# Altium PCB ESP32-PicoDK-min.PcbDoc
Units mil, origin at the board's own origin, x right, y up, seen from the top; angles counter-clockwise.
Board outline 2080 x 860 mil, 2 copper layers (Top1, Bottom2), stack 40.202 mil thick; 29 components, 48 nets, 156 pads, 115 vias.
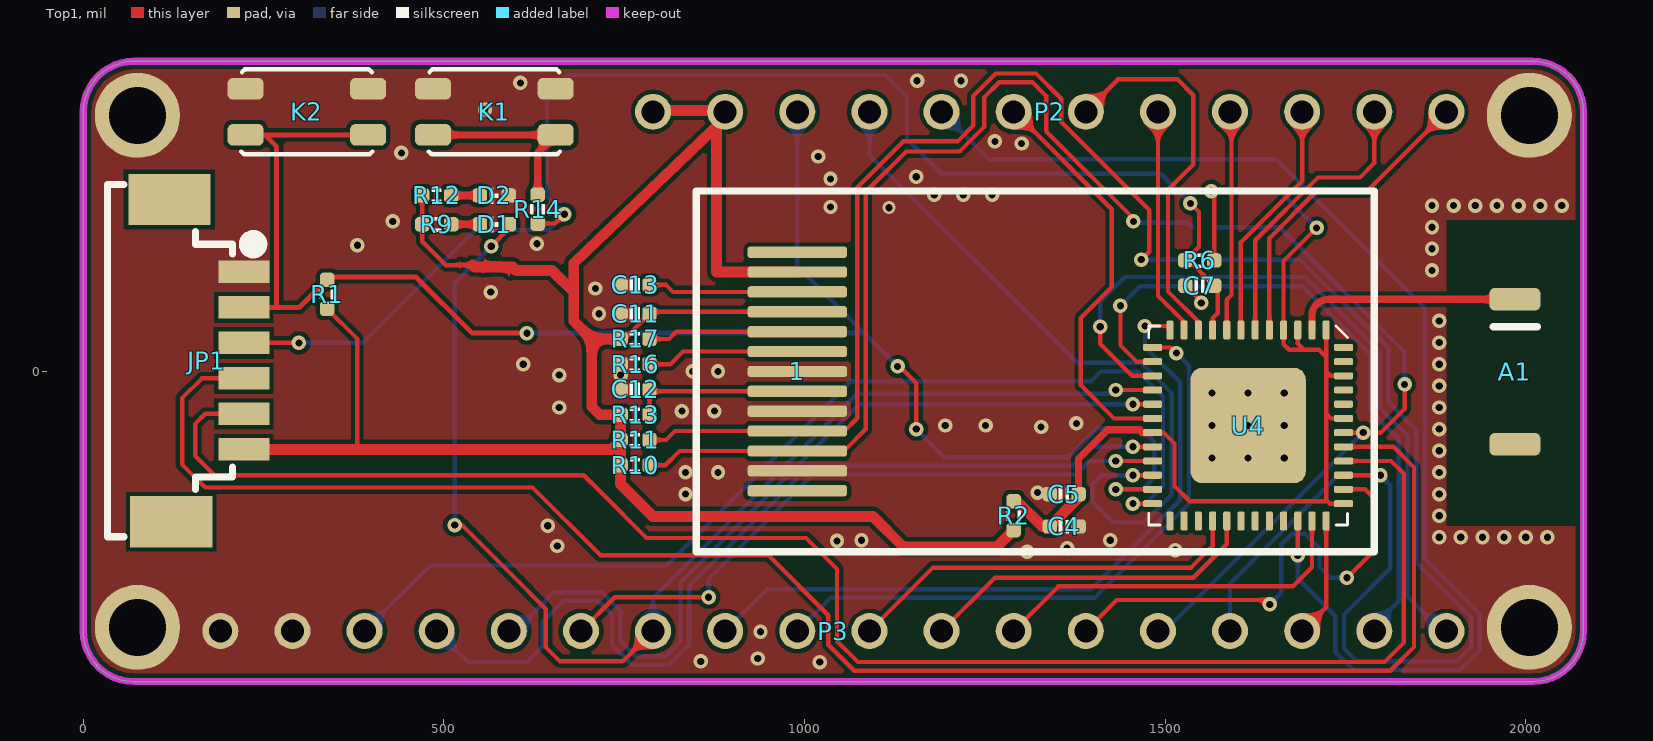
[diagram p0: Top1 view]
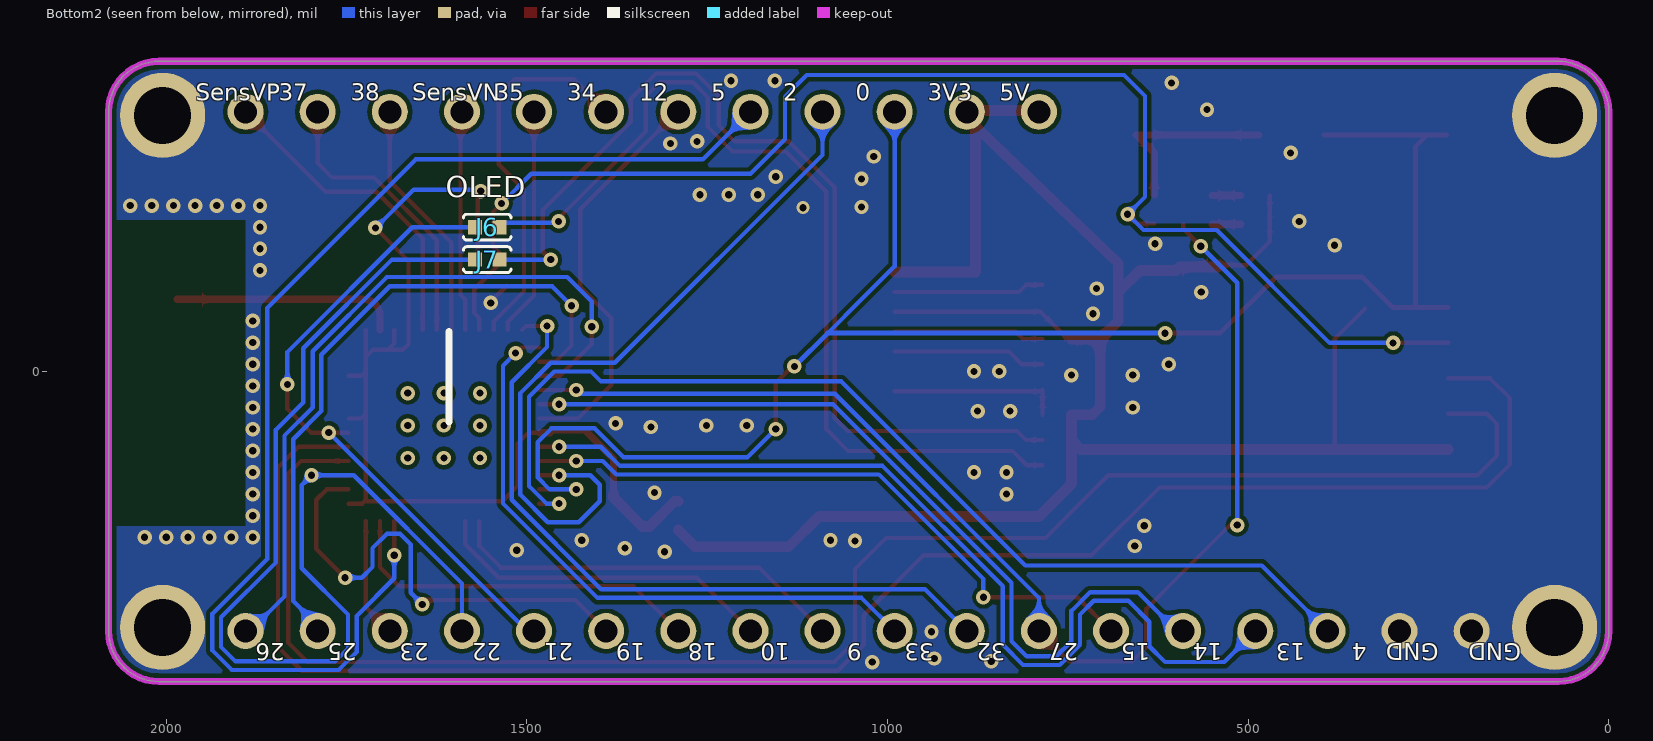
[diagram p1: Bottom2 view, seen from below]
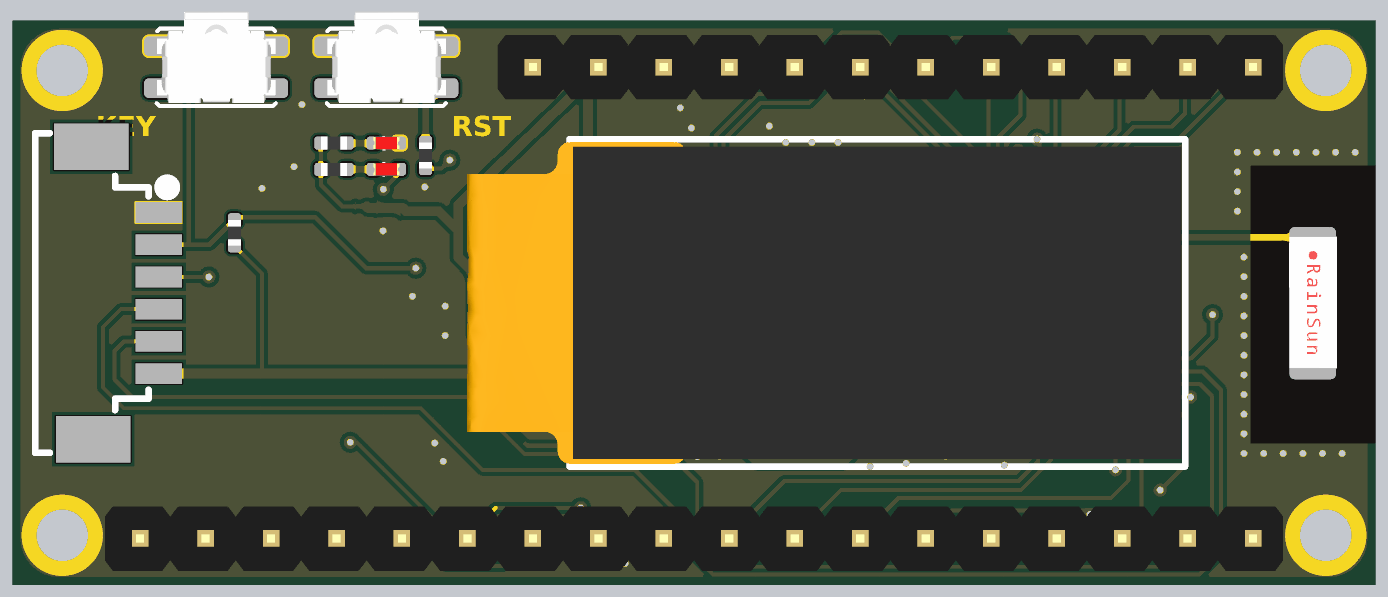
[diagram p2: 3D render of the assembled board from above, using the file's embedded part models]

## Layer stack, top to bottom
Top Solder: solder mask 0.4, Solder Resist, Dk 3.5
Top1: signal copper 1.4
Dielectric 1: core 37.4016, FR-4, Dk 4.2
Bottom2: signal copper 1.4
Bottom Solder: solder mask 0.4, Solder Resist, Dk 3.5

## Board outline
0,-360 0,360 cw(c70,360) 70,430 2010,430 cw(c2010,360) 2080,360 2080,-360 cw(c2010,-360) 2010,-430 70,-430 cw(c70,-360)

## Design rules (kind name [scope] priority, off if disabled: settings)
Clearance [All] p1: gap=6 ignorepadtopadclearanceinfootprint=FALSE
ComponentClearance [All] p1: gap=0 collisioncheckmode=3 verticalgap=0 showdistances=FALSE
DiffPairsRouting [All] p1: maxlimit=9 minlimit=9 mostfreqgap=9 toplayer_minwidth=4 toplayer_maxwidth=4 toplayer_prefwidth=4 bottomlayer_minwidth=4 bottomlayer_maxwidth=4 bottomlayer_prefwidth=4 maxuncoupledlength=500
FanoutControl Fanout_BGA [All] p1: bgadir=Out bgaviamode=Centered fanoutstyle=Auto fanoutdirection=Alternating viagrid=1 // Fanout_BGA (Default Rule)
HoleSize [All] p1: absolutevalues=TRUE maxlimit=10000 minlimit=8 maxpercent=80.000 minpercent=20.000
MinimumSolderMaskSliver [All] p1 off: minsoldermaskwidth=2
PlaneClearance [All] p1: clearance=8
PlaneConnect [All] p1: planeconnectstyle=Direct reliefexpansion=20 reliefentries=4 reliefconductorwidth=10 reliefairgap=10
PolygonConnect [All] p1: connectstyle=Direct reliefconductorwidth=10 reliefentries=4 polygonreliefangle="90 Angle" airgapwidth=10
RoutingVias [All] p1: holewidth=8 width=16 viastyle="Through Hole" minholewidth=6 minwidth=12 maxholewidth=28 maxwidth=50
SilkToBoardRegionClearance [All] p1 off:
SilkToSilkClearance [All] p1: silktosilkclearance=0
SilkToSolderMaskClearance [IsPad] p1: minsilkscreentomaskgap=0 clearancetoexposedcopper=TRUE
SolderMaskExpansion [All] p1: expansion=3
Width [All] p1: maxlimit=10000 minlimit=6 preferedwidth=7
20 further rules are at their usual default settings.

## Components (designator, comment, footprint, x,y, rotation, side; value= is the part's Value field where it differs from the comment)
1 "OLED-12880" OLED-12880 990,0 r180 top locked
A1 "RAINSUN" ANT-Rainsun-AN5120 1985,0 r270 top
C4 "10uF" CAP_0402 1360,-215 r180 top value=0.1u
C5 "0.1uF" CAP_0402 1360,-170 r0 top value=0.1u
C7 "0.1uF" CAP_0402 1548,118.89 r180 top value=0.1u
C11 "10uF" CAP_0402 765,80 r0 top value=0.1u
C12 "10uF" CAP_0402 765,-25 r0 top value=0.1u
C13 "10uF" CAP_0402 765,120 r0 top value=0.1u
D1 "color?" LED_0402_RED 570,204 r0 top
D2 "color?" LED_0402_RED 570,244 r0 top
J6 "跳线" 0402-0R 1555,200 r0 bottom
J7 "跳线" 0402-0R 1555,155 r0 bottom
JP1 "SPI1" CONN-SMD_6P-P1.25_DEALON_1.25-6PWB 171,15 r270 top
K1 "TACT 4P" ButtonTACT_3.5*3.55_90 570,360 r0 top value=3.4x3.5
K2 "TACT 4P" ButtonTACT_3.5*3.55_90 310,360 r0 top value=3.4x3.5
P2 "HDR1x12_2.54" HDR1X12_2.54_180 1890,360 r270 top locked
P3 "HDR1x18_2.54" HDR1X18_2.54_180 1890,-360 r270 top locked
R1 "10K" RES_0402 338,107 r270 top value=22R
R2 "0R" RES_0402 1290,-200 r90 top value=22R
R6 "10K" RES_0402 1548,153.89 r180 top value=22R
R9 "1K" RES_0402 490,204 r0 top value=22R
R10 "10K" RES_0402 765,-130 r180 top value=22R
R11 "10K" RES_0402 765,-95 r180 top value=22R
R12 "1K" RES_0402 490,244 r0 top value=22R
R13 "10K" RES_0402 765,-60 r180 top value=22R
R14 "1K" RES_0402 630,225 r270 top value=22R
R16 "560K" RES_0402 765,10 r180 top value=22R
R17 "4.7K" RES_0402 765,45 r180 top value=22R
U4 "ESP32_SIP" QFN-48_7X7 1615,-75 r270 top

## Footprints (in the part's own frame and the unit in brackets; to place one, negate y for a bottom-side part, rotate by r counter-clockwise, add the part's x,y. Pads: shape width x height; smd on the part's side, far side on the other; paste and mask are expansions set on the pad)
0402-0R [mm] "选择焊盘"
  rect 0.5x0.5 smd: 1(-0.432,0) 2(0.432,0)
  silkscreen extent -0.84,-0.46 0.84,0.46
ANT-Rainsun-AN5120 [mm] "选择焊盘"
  rrect50% 0.8x1.8 smd: 1(-2.54,0) ""(2.563,0)
  silkscreen extent -1.57,-0.76 -1.57,0.79, body extent -2.57,-0.91 2.54,0.94, height 1.32
ButtonTACT_3.5*3.55_90 [mil]
  rrect50% 50x30 smd: 1(-85,32) 2(-85,-32) 3(85,32) 4(85,-32)
  silkscreen extent -91,-59 91,59, body extent -90,-55 91,85, height 56
CAP_0402 [mil]
  rrect50% 20x20 smd: 1(-20,0) 2(20,0)
  silkscreen extent -7,-9 7,9, body extent -20,-10 20,10, height 20
CONN-SMD_6P-P1.25_DEALON_1.25-6PWB [mm]
  rect 0.8x1.8 smd mask+0.05: 1(-3.125,1.31) 2(-1.875,1.31) 3(-0.625,1.31) 4(0.625,1.31) 5(1.875,1.31) 6(3.125,1.31)
  rect 1.8x2.9 smd mask+0.05: 7(-5.675,-1.31) 8(5.675,-1.24)
  silkscreen extent -6.2,-3.49 6.2,1.88
HDR1X12_2.54_180 [mil]
  round 50 hole 32: 1(0,0) 2(0,-100) 3(0,-200) 4(0,-300) 5(0,-400) 6(0,-500) 7(0,-600) 8(0,-700) 9(0,-800) 10(0,-900) 11(0,-1000) 12(0,-1100)
  body extent -49,-1150 49,50, height 323
HDR1X18_2.54_180 [mil]
  round 50 hole 32: 1(0,0) 2(0,-100) 3(0,-200) 4(0,-300) 5(0,-400) 6(0,-500) 7(0,-600) 8(0,-700) 9(0,-800) 10(0,-900) 11(0,-1000) 12(0,-1100) 13(0,-1200) 14(0,-1300) 15(0,-1400) 16(0,-1500) 17(0,-1600) 18(0,-1700)
  body extent -49,-1750 49,50, height 323
LED_0402_RED [mil]
  rrect50% 20x20 smd: 1(-20,0) 2(20,0)
  silkscreen extent -6,-11 6,10, body extent -20,-10 20,10, height 18
OLED-12880 [mm]
  rrect50% 3.5x0.4 smd: 1(0,-4.2) 2(0,-3.5) 3(0,-2.8) 4(0,-2.1) 5(0,-1.4) 6(0,-0.7) 7(0,0) 8(0,0.7) 9(0,1.4) 10(0,2.1) 11(0,2.8) 12(0,3.5) 13(0,4.2)
  silkscreen extent -20.32,-6.35 3.56,6.35, body extent -20.18,-6.25 7.54,6.25, height 1.55
QFN-48_7X7 [mm]
  rrect50% 0.675x0.25 smd: 1(-3.362,2.75) 2(-3.362,2.25) 3(-3.362,1.75) 4(-3.362,1.25) 5(-3.362,0.75) 6(-3.362,0.25) 7(-3.362,-0.25) 8(-3.362,-0.75) 9(-3.362,-1.25) 10(-3.362,-1.75) 11(-3.362,-2.25) 12(-3.362,-2.75) 25(3.363,-2.75) 26(3.363,-2.25) 27(3.363,-1.75) 28(3.363,-1.25) 29(3.363,-0.75) 30(3.363,-0.25) 31(3.363,0.25) 32(3.363,0.75) 33(3.363,1.25) 34(3.363,1.75) 35(3.363,2.25) 36(3.363,2.75)
  rrect50% 0.25x0.675 smd: 13(-2.75,-3.362) 14(-2.25,-3.362) 15(-1.75,-3.362) 16(-1.25,-3.362) 17(-0.75,-3.362) 18(-0.25,-3.362) 19(0.25,-3.362) 20(0.75,-3.362) 21(1.25,-3.362) 22(1.75,-3.362) 23(2.25,-3.362) 24(2.75,-3.362) 37(2.75,3.363) 38(2.25,3.363) 39(1.75,3.363) 40(1.25,3.363) 41(0.75,3.363) 42(0.25,3.363) 43(-0.25,3.363) 44(-0.75,3.363) 45(-1.25,3.363) 46(-1.75,3.363) 47(-2.25,3.363) 48(-2.75,3.363)
  rrect20% 4.064x4.064 smd: 49(0,0)
  silkscreen extent -3.5,-3.5 3.5,3.5, body extent -3.5,-3.5 3.5,3.5, height 1
RES_0402 [mil]
  rrect50% 20x20 smd: 1(-20,0) 2(20,0)
  silkscreen extent -7,-10 7,10, body extent -20,-10 20,10, height 14

## Part data
A1: library part ANT-Rainsun-AP5120
C4 C5 C7 C11 C12 C13: library part 电容-0402, "Capacitor"
D1 D2: library part LED_0402, "LED", Type=0402
J6 J7: "Resistor", LatestRevisionDate=17-Jul-2002, LatestRevisionNote="Re-released for DXP Platform.", PackageDescription="Axial Device, Thru-Hole; 2 Leads; 0.4 in Pin Spacing", PackageReference=AXIAL-0.4, Published=8-Jun-2000, Publisher="Altium Limited"
JP1: library part "HEADER 6"
K1 K2: library part ButtonTACT, "Button", Type="TACT 4P"
P2 P3: "Header"
R1 R2 R6 R9 R10 R11 R12 R13 R14 R16 R17: library part 电阻-0402, "Resistor"
U4: library part ESP32-PICO

## Free pads (board coordinates)
  round 118.11 hole 78.74: ""(75,-355) ""(75,355) ""(2005,-355) ""(2005,355)

## Via types
v1: diameter 20, hole 10, Top1 to Bottom2, tented both sides, 114 vias
v2: diameter 18, hole 10, Top1 to Bottom2, tented both sides, 1 vias

## Nets (pads, with @x,y where several pads share a name; then routed paths per layer and width w, separated by ;. In a path a pad name is that pad's centre, name@x,y a point inside that pad or via, vN(x,y) a via of type N, cw(c..) or ccw(c..) an arc to the next point about the centre after c; other vN are vias at no path point)
3V3A: C4.2 C5.2 R2.2 R6.1 U4.1 U4.3 U4.4 U4.19 U4.37 U4.43 U4.46 | length 1470.8
  Top1 w6: U4.19 1497.84,-84.84 1513,-100 1513,-159 1534,-180 1721.53,-180 1723.27,-178.27 ; v1(1563.99,250) 1568,245.99 R6.1 ; U4.3 1683.9,38.74 1692.63,30 ; v1(1710,199) 1664.21,153.21 U4.4 1664.21,37.79 1672,30 1692.63,30 ; U4.1 1723.27,20 ; U4.37 1728.27,-183.27 1723.27,-178.27 ; U4.43 1730.16,-65.16 1723.27,-58.27 ; U4.46 1729.1,-6.1 1723.27,-0.27 ; 1692.63,30 1713.27,30 1723.27,20 ; 1723.27,-178.27 1723.27,-58.27 ; 1723.27,-58.27 1723.27,-0.27 ; 1723.27,-0.27 1723.27,20
  Top1 w7: C4.2@1335,-215 C4.2
  Top1 w10: C5.2 1380,-121 1420,-81 1464,-81 1468,-85 1482.46,-85 U4.19
  Top1 w15: R2.2 1295,-180 1330,-215 C4.2@1335,-215 ; C4.2 1380,-175 C5.2
  Bottom2 w6: v1(1563.99,250) 1565.99,252 1657,252 v1(1710,199)
EN: C7.1 JP1.3 R6.2 R14.2 U4.9 | length 1960
  Top1 w6: JP1.3 v1(299,39.61) ; R14.2 654,205 v1(667,218) ; v1(1535,233) 1547,221 1547,172.89 R6.2 1533,153.89 C7.1 1573,113.89 1573,81 1565.79,73.79 U4.9
  Bottom2 w6: v1(299,39.61) 386.92,39.61 543.31,196 645,196 v1(667,218) 643,242 643,382 672,411 1112,411 1142,381 1142,322 1190,274 1337,274 1494,274 v1(1535,233)
FLASH_CLK: U4.31
FLASH_CS: U4.25
FLASH_SD0: U4.27
FLASH_SD1: U4.33
FLASH_SD2: U4.30
FLASH_SD3: U4.32
GND: 1.7 1.9 1.12 C4.1 C5.1 C7.2 C11.1 C12.1 C13.1 D2.2 JP1.1 K1.1 K1.3 K2.1 K2.3 P3.17 P3.18 pad. R16.2 | length 33
  Top1 w6: C7.2 1550,96.89 v1(1550,95)
  other v1: 1021,-403 856,-402 935,-398 939,-361 1309,-250 1514,-248 1364,-245 657,-242 1045,-235 1079,-234 1424,-234 1880,-230 1910,-230 1940,-230 1970,-230 2000,-230 2030,-230 644,-214 1880,-200 835,-170 1880,-170 1323,-168 835,-140 880,-140 1880,-140 1880,-110 1880,-80 1328,-77 1195,-75 1251,-75 1377,-72 830,-55 875,-55 660,-50 1880,-50 1880,-20 660,-5 745,-5 845,0 880,0 610,10 1880,10 1880,40 1880,70 715,80 565,110 710,115 1870,140 1870,170 380,175 629,177 1870,200 429,208 1036,228 1870,230 1900,230 1930,230 1960,230 1990,230 2020,230 2050,230 1180,245 1220,245 1260,245 1036,267 1155,270 1019,298 441,303 1301,316 1264,319 557,363 606,400 1156,403 1217,403
  other v2: 1117,227
GPIO0: JP1.2 K2.2 K2.4 P2.10 R1.1 U4.23 | length 2433.1
  Top1 w6: v1(1129,7) 1132,7 1155,-16 1155,-35.71 v1(1155,-80) ; v1(1431.42,-163.58) U4.23
  Top1 w7: JP1.2 267.13,88.82 ; K2.2 251.63,328 ; K2.4 251.63,328 ; v1(615,53) 539.21,53 461.14,131.08 342.08,131.08 R1.1 299.82,88.82 267.13,88.82 ; 251.63,328 268.13,311.5 268.13,89.82 267.13,88.82
  Bottom2 w6: P2.10 990,146 v1(1129,7) ; v1(1155,-80) 1194,-119 1366,-119 1406,-79 1466,-79 1485,-98 1485,-147 1468.42,-163.58 v1(1431.42,-163.58)
  Bottom2 w7: v1(615,53) 1083,53 v1(1129,7)
GPIO2: P2.9 U4.22 | length 1006.5
  Top1 w6: v1(1455.27,-143.9) U4.22
  Bottom2 w6: P2.9 1090,300 1378,12 1457,12 1466.97,12 1509,-30.03 1509,-171 1471,-209 1428,-209 1399,-180 1399,-157 1412.1,-143.9 v1(1455.27,-143.9)
GPIO4: P3.16 U4.24 | length 1473.7
  Top1 w6: v1(1455.27,-183.27) U4.24
  Bottom2 w6: P3.16 481,-269 809,-269 1064.21,-13.79 1397.21,-13.79 1411,0 1462,0 1497,-35 1497,-159 1472.73,-183.27 v1(1455.27,-183.27)
GPIO5: P2.8 U4.34 | length 1713.9
  Top1 w6: v1(1683.9,-254.9) U4.34
  Bottom2 w6: P2.8 1256,294 1654,294 1860,88 1860,-260 1936,-336 1936,-386.97 1908.97,-414 1761.03,-414 1736,-388.97 1736,-339 1683.9,-286.9 v1(1683.9,-254.9)
GPIO9: P3.9 U4.28 | length 559.4
  Top1 w6: P3.9 1178,-272 1536.03,-272 1565.79,-242.24 U4.28
GPIO10: P3.8 U4.29 | length 477.5
  Top1 w6: P3.8 1264,-286 1539,-286 1585.47,-239.53 U4.29
GPIO12: P2.7 U4.18 | length 572.5
  Top1 w6: P2.7 1291,360 1426,225 1426,117 1383,74 1383,-19 1429.16,-65.16 U4.18
GPIO13: P3.15 U4.20 | length 1299.8
  Top1 w6: v1(1455.27,-104.53) U4.20
  Bottom2 w6: P3.15 533,-403 615,-403 637,-381 637,-347 666,-318 714,-318 733,-337 733,-378.97 761.03,-407 812.03,-407 840,-379.03 840,-297.91 1006.91,-131 1370.97,-131 1397.44,-104.53 v1(1455.27,-104.53)
GPIO14: P3.14 U4.17 | length 1168.7
  Top1 w6: v1(1455.27,-45.47) U4.17
  Bottom2 w6: P3.14 599,-360 653,-306 718.97,-306 745,-332.03 745,-342 745,-374 766,-395 807.06,-395 828,-374.06 828,-292.94 1075.47,-45.47 v1(1455.27,-45.47)
GPIO15: P3.13 U4.21 | length 905
  Top1 w6: P3.13 737,-313 v1(867,-313) ; v1(1431.42,-124.21) U4.21
  Bottom2 w6: v1(867,-313) 867,-287.88 1011.88,-143 1375.94,-143 1394.73,-124.21 v1(1431.42,-124.21)
GPIO18: P3.7 U4.35 | length 514.3
  Top1 w6: P3.7 1352,-298 1677,-298 1703.58,-271.42 U4.35
GPIO19: P3.6 U4.38 | length 677.8
  Top1 w6: P3.6 1433,-317 1639,-317 v1(1645,-323) ; U4.38 1777.58,-163.58 1792,-178 1792,-246 v1(1752,-286)
  Bottom2 w6: v1(1645,-323) 1661,-307 1661,-239.97 1675.97,-225 1694,-225 1714,-245 1714,-271 1729,-286 v1(1752,-286)
GPIO21: J6.2 P3.5 U4.42 | length 907.6
  Top1 w6: U4.42 v1(1774.73,-84.84) 1799.16,-84.84 1832,-52 v1(1832,-18)
  Bottom2 w6: P3.5 1499.58,-360 v1(1774.73,-84.84) ; J6.2 1659,200 1832,27 v1(1832,-18)
GPIO22: J7.2 P3.4 U4.39 | length 1602.1
  Top1 w6: U4.39 v1(1798.58,-143.9)
  Bottom2 w6: J7.2 1687.03,155 1810,32.03 1810,-43 1848,-81 1848,-264.97 1924,-340.97 1924,-382 1904,-402 1766,-402 1748,-384 1748,-337 1812,-273 1812,-157.35 v1@1798.58,-143.93 ; P3.4 1590,-294 1740.1,-143.9 v1(1798.58,-143.9)
GPIO23: P3.3 U4.36 | length 166.4
  Top1 w6: P3.3 1723.27,-326.73 U4.36
GPIO25: P3.2 U4.14 | length 919.8
  Top1 w6: v1(1438,91) 1438,35.91 1460.33,13.58 U4.14
  Bottom2 w6: v1(1438,91) 1465,118 1690.09,118 1785,23.09 1785,-54.97 1824,-93.97 1824,-318.33 1790,-352.33 P3.2
GPIO26: P3.1 U4.15 | length 1023.7
  Top1 w6: v1(1410.03,62.03) 1410,38 1454.1,-6.1 U4.15
  Bottom2 w6: v1(1410.03,62.03) 1410,97 1444,131 1694.06,131 1797,28.06 1797,-50 1836,-89 1836,-312 1884,-360 P3.1
GPIO27: D1.2 P3.12 U4.16 | length 1707.8
  Top1 w6: v1(515,-213) 525,-213 595,-283 641,-329 641,-382 661,-402 748,-402 P3.12 ; v1(565.5,173.5) 590,198 D1.2 ; v1(1431.42,-25.79) U4.16
  Bottom2 w6: v1(515,-213) 515,123 v1(565.5,173.5) ; P3.12 790,-313.97 1072.97,-31 1426.2,-31 v1(1431.42,-25.79)
GPIO32: P3.11 U4.12 | length 1004.8
  Top1 w6: v1(1472,63) 1501.11,63 U4.12
  Bottom2 w6: P3.11 948,-302 1397.03,-302 1521,-178.03 1521,-15.03 1472,33.97 v1(1472,63)
GPIO33: P3.10 U4.13 | length 868.2
  Top1 w6: U4.13 1507.73,33.27 v1(1515.58,25.42)
  Bottom2 w6: P3.10 1036,-314 1402,-314 1533,-183 1533,8 v1(1515.58,25.42)
GPIO34: P2.6 U4.10 | length 534.3
  Top1 w6: P2.6 1435,405 1517,405 1539,383 1539,287 1504,252 1504,111 1546.1,68.9 U4.10
GPIO35: P2.5 U4.11 | length 317.7
  Top1 w6: P2.5 1490,105 1526.42,68.58 U4.11
GPIO37: P2.2 U4.6 | length 405
  Top1 w6: U4.6 1624.84,181.87 1711.97,269 1770,269 1790,289 P2.2
GPIO38: P2.3 U4.7 | length 337.9
  Top1 w6: U4.7 1605,57.54 1605,179 1690,264 P2.3
Net1_3: 1.3 C13.2 | length 209
  Top1 w6: C13.2 808,120 817.76,110.24 1.3
Net1_5: 1.5 R17.1 | length 209.2
  Top1 w6: R17.1 812,45 822.12,55.12 1.5
Net1_6: 1.6 R16.1 | length 212.3
  Top1 w6: R16.1 814,10 831.56,27.56 1.6
Net1_8: 1.8 C12.2 R13.1 | length 241.1
  Top1 w6: R13.1 C12.2 787.56,-27.56 1.8
NetA1_1: A1.1 U4.2 | length 350.3
  Top1 w10: U4.2 1703.58,78.09 ; A1.1 1727.66,100 ; 1703.58,78.09 cw(c1723.96,78.09) 1709.55,92.5 ; 1703.58,78.09 cw(c1723.96,78.09) 1709.55,92.5 ; 1709.55,92.5 cw(c1727.66,74.39) 1727.66,100 ; 1709.55,92.5 cw(c1727.66,74.39) 1727.66,100
NetD1_1: D1.1 R9.2 | length 40
  Top1 w10: R9.2 D1.1
NetD2_1: D2.1 R12.2 | length 40
  Top1 w10: R12.2 D2.1
NetK1_2: K1.2 K1.4 R14.1 | length 263.4
  Top1 w10: K1.2 K1.4 630,303 R14.1
OLED_SCL: 1.10 J7.1 R11.1 | length 1356.5
  Top1 w6: R11.1 808,-95 820.33,-82.67 1.10 1055.33,-82.67 1073,-65 1073,255 1137,319 1212.03,319 1234,340.97 1234,382 1265,413 1320.97,413 1356,377.97 1356,345.92 1478,223.92 1478,166 v1(1467,155)
  Bottom2 w6: v1(1467,155) J7.1
OLED_SDA: 1.11 J6.1 R10.1 | length 1312.8
  Top1 w6: R10.1 807,-130 826.77,-110.23 1.11 1054.77,-110.23 1085,-80 1085,249 1141,305 1215,305 1249,339 1249,380 1270,401 1316,401 1335,382 1335,333 1458.87,209.13 1457.75,208 v1(1456,208)
  Bottom2 w6: v1(1456,208) 1456,203 1459,206 1532,206 J6.1
RXD: JP1.5 U4.40 | length 2306.7
  Top1 w6: JP1.5 169.19,-58.81 155,-73 155,-117 182,-144 694,-144 719,-169 781,-231 1002,-231 1045,-274 1045,-374.03 1073.97,-403 1804,-403 1831,-376 1831,-142 1813.21,-124.21 U4.40
SENSOR_VN: P2.4 U4.8 | length 306.2
  Top1 w6: U4.8 1585.47,99.44 1592,105.97 1592,358 P2.4
SENSOR_VP: P2.1 U4.5 | length 445.3
  Top1 w6: U4.5 1644.53,184.59 1708.94,249 1779,249 P2.1
TXD: JP1.4 U4.41 | length 2411.5
  Top1 w6: JP1.4 164.4,-9.6 137,-37 137,-129 169,-161 590.5,-161 623,-161 717,-255 950,-255 1033,-338 1033,-379 1069,-415 1812,-415 1845,-382 1845,-133 1816.53,-104.53 U4.41
VCC_3V3: 1.2 1.4 C11.2 JP1.6 P2.11 P2.12 R1.2 R2.1 R9.1 R10.2 R11.2 R12.1 R13.2 R17.2 | length 3047
  Top1 w6: R1.2 380,45 380,-108.03 ; R12.1 R9.1 470,180 502.6,147.4 539.94,147.4 ; R17.2 750,45 C11.2 787.68,82.68 1.4
  Top1 w7: P2.12 798.13,360 798.13,357 P2.12@796,357 ; P2.11 899.22,360 P2.11@901.22,362
  Top1 w15: JP1.6 380,-108.03 731.97,-108.03 R11.2 ; 539.94,147.4 542.35,145 595,145 600,140 650,140 680,110 ; R17.2 705,45 ; P2.12@796,357 801,362 P2.11@901.22,362 ; P2.11 P2.11@890,351.25 ; 1.2 878,137.8 878,339.25 P2.11@890,351.25 ; R2.1 1267,-243 1137,-243 1095,-201 790,-201 745,-156 R10.2 R11.2 ; 680,110 680,150 P2.11@890,351.25 ; 680,110 680,70 705,45 ; 705,45 705,-49 716,-60 R13.2 R11.2
pads on no net: 1.1 1.13 A1. JP1.7 JP1.8 U4.26 U4.44 U4.45 U4.47 U4.48 U4.49
copper on no net:
  other v1: 1565,-120 1615,-120 1665,-120 1565,-75 1615,-75 1665,-75 1565,-30 1615,-30 1665,-30

## Polygon pours and split planes (outlines as drawn)
GND on Bottom2 "GND_L02_P001" (solid, remove dead copper, pour order 1): -4,460.39 -4,-459.61 2116,-459.61 2116,460.39
GND on Top1 "GND_L01_P000" (solid, remove dead copper, pour order 0): -20,460 -20,-460 2100,-460 2100,460

## Keep-outs
Keep-Out Layer:
  the board outline again, w10

## Other copper
Top1:
  pour cut-out: 1890,210 1890,-215 2115,-215 2115,210
Bottom2:
  pour cut-out: 1890,210 1890,-215 2115,-215 2115,210

## Silkscreen, mask and mechanical layers (free items; w line width, h text height)
Bottom Overlay:
  lines w10: 1607.84,-69.84 1607.84,55.16
  text "5V" at 844.24,367.98 h40
  text "3V3" at 944.24,367.98 h40
  text "0" at 1044.24,367.98 h40
  text "2" at 1144.24,367.98 h40
  text "5" at 1244.24,367.98 h40
  text "12" at 1344.24,367.98 h40
  text "34" at 1444.24,367.98 h40
  text "35" at 1544.24,367.98 h40
  text "SensVN" at 1659.09,367.98 h40
  text "38" at 1744.24,367.98 h40
  text "37" at 1844.24,367.98 h40
  text "SensVP" at 1959.09,367.98 h40
  text "OLED" at 1612.58,232.01 h50
  text "GND" at 120.91,-368.98 h40 r180
  text "GND" at 235.76,-368.98 h40 r180
  text "4" at 335.76,-368.98 h40 r180
  text "13" at 420.91,-368.98 h40 r180
  text "14" at 535.76,-368.98 h40 r180
  text "15" at 635.76,-368.98 h40 r180
  text "27" at 735.76,-368.98 h40 r180
  text "32" at 835.76,-368.98 h40 r180
  text "33" at 935.76,-368.98 h40 r180
  text "9" at 1035.76,-368.98 h40 r180
  text "10" at 1135.76,-368.98 h40 r180
  text "18" at 1235.76,-368.98 h40 r180
  text "19" at 1335.76,-368.98 h40 r180
  text "21" at 1435.76,-368.98 h40 r180
  text "22" at 1535.76,-368.98 h40 r180
  text "23" at 1635.76,-368.98 h40 r180
  text "25" at 1735.76,-368.98 h40 r180
  text "26" at 1835.76,-368.98 h40 r180
Top Solder:
  rectangle: 1890,-215 2115,210
  text "KEY" at 118.18,236.99 h60
  text "RST" at 661.65,236.99 h60
Bottom Solder:
  rectangle: 1890,-215 2115,210
Mechanical 1:
  the board outline again, w10